# EAGLE board motor_connector_board (EAGLE 8.5.0)
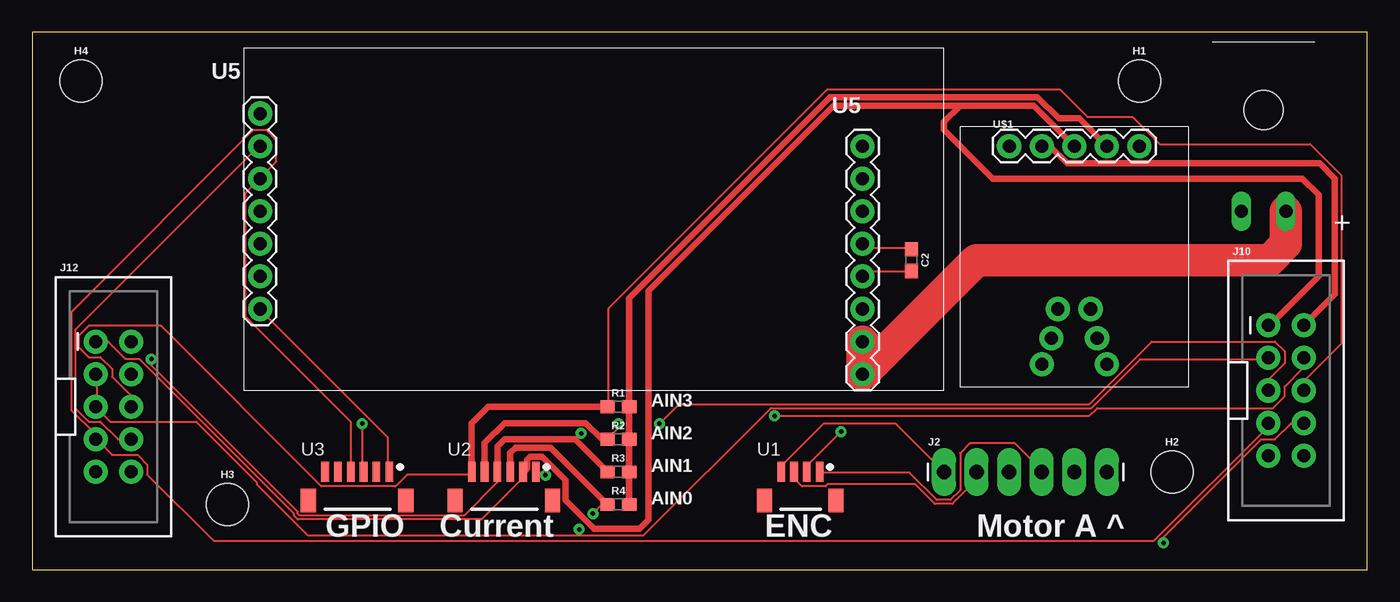
[diagram p0: board, top side]
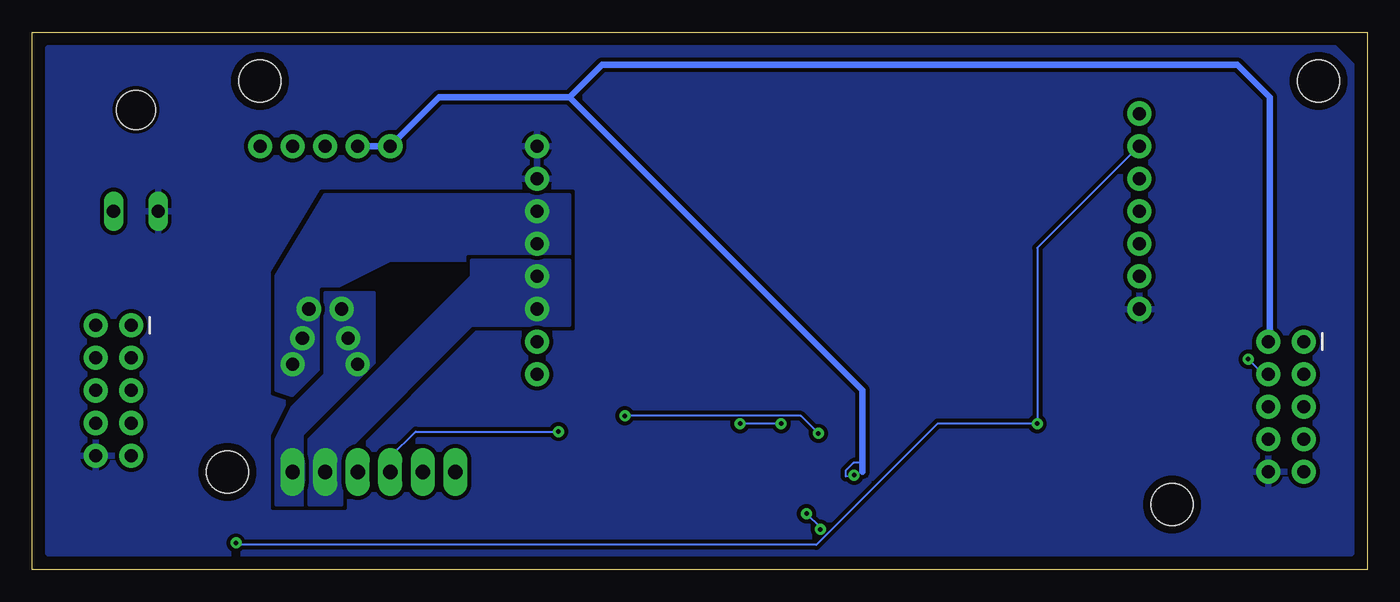
[diagram p1: board, bottom side, seen from below]

Size 104.14 x 41.91 mm. Coordinates in mm from the lower left corner, seen from the top.
Outline: 0,0 104.14,0 104.14,41.91 0,41.91 0,0
Copper layers (1*16): Top 0.035mm / dielectric 1.5mm / Bottom 0.035mm
Design rules "SparkFun-2-layer-STANDARD": minimum track width 10mil, minimum drill 20mil, track to track 10mil, track to pad 8mil, pad to pad 8mil, via to via 10mil, smd to smd 8mil, copper to edge 8mil, drill to drill 8mil, minimum pad ring 10mil, minimum via ring 10mil, stop-mask expansion 4mil, vias tented up to drill 25mil, thermal gap 10mil
Net classes: 0 default: width 0.152 mm, drill 0.254 mm, clearance 0.152 mm; 1 ground: width 0.152 mm, drill 0.254 mm, clearance 0.152 mm; 3 power: width 0.152 mm, drill 0.254 mm, clearance 0.152 mm

## Footprints (pad centres in the part's own frame; a part is rotated, then mirrored left to right if it is on the bottom)
0603 = smd 1.1 x 1: 1 -0.85,0; 2 0.85,0
STAND-OFF = hole 3.302: 0,0
1X06_LONGPADS = drill 1.118 pad 1.88 long: 1 0,0; 2 2.54,0; 3 5.08,0; 4 7.62,0; 5 10.16,0; 6 12.7,0
2X5-SHROUDED_LOCK = drill 1.016 pad 1.88: 1 -1.397,5.08; 2 1.397,5.08; 3 -1.397,2.54; 4 1.397,2.54; 5 -1.397,0; 6 1.397,0; 7 -1.397,-2.54; 8 1.397,-2.54; 9 -1.397,-5.08; 10 1.397,-5.08
JST_SH_4_SMD = smd 0.6 x 1.55: 1 0.46,1.27; 2 -0.54,1.27; 3 -1.54,1.27; 4 -2.54,1.27 | smd 1.2 x 1.8: P$1 -3.84,-0.955; P$2 1.728,-0.955
JST_SH_6 = smd 0.6 x 1.55: 1 5,0; 2 4,0; 3 3,0; 4 2,0; 5 1,0; 6 0,0 | smd 1.2 x 1.8: P$1 -1.3,-2.225; P$2 6.3,-2.225
MOLEX_ULTRAFIT-2CKT = drill 1.02 long: + 0,0; - 3.5,0 | hole 3.05: 1.75,-7.91
SMC = drill 1.016 pad 1.88: 1 0,0; 2 0,-2.54; 3 0,-5.08; 4 0,-7.62; 5 0,-10.16; 6 0,-12.7; 7 0,-15.24; 8 0,-17.78; 9 -46.99,2.54; 10 -46.99,0; 11 -46.99,-2.54; 12 -46.99,-5.08; 13 -46.99,-7.62; 14 -46.99,-10.16; 15 -46.99,-12.7
ACS_CURRENT_SENSOR = drill 1.016 pad 1.88: 1 0,-10.16; 2 0,-7.62; 3 0,-5.08; 4 0,-2.54; 5 0,0; IN-1 12.7,-3.81; IN-2 14.986,-3.302; IN-3 17.018,-2.54; OUT-1 12.7,-6.35; OUT-2 14.986,-6.858; OUT-3 17.018,-7.62

## Placement (x,y rotation side)
C2  0.1uF  [0603]  68.58,24.13 270 top
FRAME1  FRAME-LEDGER  [CREATIVE_COMMONS]  11.43,2.54 0 top
H1  STAND-OFF  [STAND-OFF]  86.36,38.1 0 top
H2  STAND-OFF  [STAND-OFF]  88.9,7.62 0 top
H3  STAND-OFF  [STAND-OFF]  15.24,5.08 0 top
H4  STAND-OFF  [STAND-OFF]  3.81,38.1 0 top
J2  [1X06_LONGPADS]  71.12,7.62 0 top
J10  [2X5-SHROUDED_LOCK]  97.79,13.97 0 top
J12  [2X5-SHROUDED_LOCK]  6.35,12.7 0 top
R1  0  [0603]  45.72,12.7 0 top
R2  0  [0603]  45.72,10.16 0 top
R3  0  [0603]  45.72,7.62 0 top
R4  0  [0603]  45.72,5.08 0 top
U1  JST_SH_4  [JST_SH_4_SMD]  60.96,6.35 0 top
U2  JST_SH_6  [JST_SH_6]  34.29,7.62 0 top
U3  JST_SH_6  [JST_SH_6]  22.86,7.62 0 top
U4  MOLEX_ULTRAFIT  [MOLEX_ULTRAFIT-2CKT]  97.79,27.94 180 top
U5  SMC  [SMC]  64.77,33.02 0 top
U$1  ACS711EX  [ACS_CURRENT_SENSOR]  86.36,33.02 270 top

## Library data of the parts
C2 = SparkFun-Capacitors; PROD_ID: CAP-07886
FRAME1 = SparkFun-Aesthetics
H1-H4 = SparkFun-Hardware
J2 = SparkFun-Connectors
J10 J12 = SparkFun-Connectors; PROD_ID: CONN-08671; SF_ID: PRT-08506
R1-R4 = SparkFun-Resistors; PROD_ID: RES-08609
U1-U3 = Strawson_Eagle_Lib
U4 U5 U$1 = WallE_Motor_Board

## Nets
ACS_GND: J10.2 J12.2 U2.1 U$1.1 U$1.2
ACS_OUT: R1.2 R2.2 R3.2 R4.2 U$1.4
ACS_VCC: J10.1 J12.1 U2.2 U$1.3
AIN0: J10.3 J12.3 J12.5 R4.1 U2.3
AIN1: J10.4 J12.4 R3.1 U2.4
AIN2: J10.5 R2.1 U2.5
AIN3: J10.6 J12.6 R1.1 U2.6
ENC_A: J2.2 U1.3
ENC_B: J2.1 U1.4
ENC_GND: J2.4 U1.1
ENC_VCC: J2.3 U1.2
GND: J10.10 J12.10 U3.1 U4.- U5.1 U5.2 U5.15
MOTORA: J2.6 U$1.OUT-1 U$1.OUT-2 U$1.OUT-3
MOTORB: C2.2 J2.5 U5.5 U5.6
MOTOROUTA: C2.1 U5.3 U5.4 U$1.IN-1 U$1.IN-2 U$1.IN-3
SMC_ERR: J10.8 J12.8 U3.3 U5.10
SMC_RST: J10.7 J12.7 U3.4 U5.11
VIN: U4.+ U5.7 U5.8

## Tracks (layer width: path | path; a pad name or v marks a point on that pad's centre or on a via)
ACS_GND  (via drill 0.35)
  Top 0.152: v40.03,7.37 39.78,7.57 39.32,7.57 U2.1
  Top 0.508: U$1.2 79.38,33.02 80.72,31.67 100.41,31.67 101.6,30.48 101.6,21.46 J10.2
  Bottom 0.152: v40.03,7.37 40.69,7.26 40.69,7.72 40.08,8.33 39.37,8.33
  Bottom 0.508: U$1.2 U$1.1 72.39,36.83 62.23,36.83 | 62.23,36.83 39.37,13.97 39.37,8.33 39.37,7.62 | 62.23,36.83 59.69,39.37 10.16,39.37 7.62,36.83 7.62,17.91 J12.2
ACS_OUT
  Top 0.508: R4.2 R3.2 R2.2 R1.2 46.57,21.17 62.23,36.83 78.42,36.83 80.07,35.18 81.66,35.18 U$1.4
ACS_VCC
  Top 0.152: J12.1 5.94,17.78 7.31,16.41 8.38,16.41 20.42,4.37 20.42,4.22 20.73,3.91 35.05,3.91 38.25,7.11 38.25,7.42 U2.2
  Top 0.508: U$1.3 78.13,36.17 72.39,36.17 | 72.39,36.17 62.5,36.17 48.09,21.76 48.09,3.9 47.37,3.17 43.81,3.17 41.6,5.39 41.6,6.96 39.76,8.8 38.82,8.8 38.58,8.56 38.58,7.91 U2.2 | 72.39,36.17 71.12,34.9 71.12,34.29 74.93,30.48 99.06,30.48 100.33,29.21 100.33,22.86 96.52,19.05 J10.1
AIN0  (via drill 0.35)
  Top 0.152: J12.3 5.03,15.19 5.03,12.75 J12.5 5.03,12.6 6.1,11.53 12.8,11.53 17.53,6.81 17.53,6.66 21.49,2.69 42.67,2.69 | 42.67,2.69 47.7,2.69 57.61,12.6 82.6,12.6 86.41,16.41 96.32,16.41 J10.3 | v43.74,4.37 44.5,5.13 R4.1 | 42.67,2.69 v42.67,3.15
  Top 0.508: R4.1 40.45,9.5 37.69,9.5 37.29,9.1 U2.3
  Bottom 0.152: v43.74,4.37 42.67,3.3 v42.67,3.15
AIN1  (via drill 0.35)
  Top 0.152: v9.3,16.41 9.3,15.95 20.73,4.52 20.73,4.37 20.88,4.22 33.68,4.22 36.27,6.81 36.27,7.42 U2.4 | v57.91,11.99 82.45,11.99 83.06,12.6 96.77,12.6 97.69,13.51 97.69,14.27 99.06,15.65 99.06,16.41 J10.4 | v42.82,10.62 42.52,10.31 42.33,10.16
  Top 0.508: R3.1 42.33,10.16 36.83,10.16 36.29,9.62 U2.4
  Bottom 0.152: v9.3,16.41 8.23,15.34 7.77,15.34 J12.4 | v57.91,11.99 44.2,11.99 v42.82,10.62
AIN2  (via drill 0.35)
  Top 0.152: v48.92,11.38 50.44,12.9 82.45,12.9 87.33,17.78 96.93,17.78 97.69,17.02 97.69,16.1 96.47,14.88 96.47,13.97 J10.5 | v45.72,11.38 45.72,11.07 44.96,10.31 R2.1
  Top 0.508: R2.1 44.45,10.16 43.18,11.43 36.83,11.43 35.29,9.89 U2.5
  Bottom 0.152: v45.72,11.38 v48.92,11.38
AIN3
  Top 0.152: J12.6 7.62,12.75 7.62,13.66 6.25,15.04 6.25,15.65 5.33,16.56 4.42,16.56 3.66,17.32 3.66,18.24 4.42,19 10.06,19 22.55,6.5 28.35,6.5 29.26,7.42 34.14,7.42 U2.6 | J10.6 99.21,13.97 99.21,14.73 102.11,17.63 102.11,30.73 99.67,33.17 87.94,33.17 85.8,35.31 82.3,35.31 80.16,37.44 62.03,37.44 44.96,20.37 44.96,12.9 R1.1
  Top 0.508: R1.1 35.56,12.7 34.29,11.43 U2.6
ENC_A
  Top 0.152: U1.3 59.44,7.57 59.44,7.11 60.05,6.5 61.87,6.5 62.03,6.66 68.89,6.66 70.41,5.13 71.78,5.13 73.61,6.96 73.61,7.57 J2.2
ENC_B
  Top 0.152: J2.1 67.36,11.38 61.72,11.38 58.52,8.18 58.52,7.72 U1.4
ENC_GND
  Top 0.152: U1.1 61.57,7.57 68.43,7.57 70.56,5.44 71.63,5.44 72.39,6.2 72.39,9.09 73.15,9.86 76.66,9.86 78.79,7.72 J2.4
ENC_VCC  (via drill 0.35)
  Top 0.152: v63.09,10.77 60.5,8.18 60.5,7.72 U1.2
  Bottom 0.152: v63.09,10.77 74.22,10.77 76.2,8.79 J2.3
GND
  Top 0.152: U3.1 27.74,7.72 27.74,10.31 17.83,20.22 U5.15
  pour Bottom (isolate 0.305, rank 6): 102.87,40.64 102.87,1.27 1.27,1.27 1.27,39.37 2.54,40.64
MOTORA
  pour Bottom (isolate 0.305, rank 4, no thermals): 81.28,21.59 77.47,21.59 77.47,15.24 82.55,10.16 82.55,5.08 85.09,5.08 85.09,10.16 83.82,12.7 81.28,15.24
MOTORB
  Top 0.152: C2.2 68.58,23.27 65.08,23.27 64.77,22.96 U5.5
  pour Bottom (isolate 0.305, rank 3, no thermals): 69.85,24.13 62.23,24.13 62.23,19.05 69.85,19.05 80.01,8.89 80.01,5.08 82.55,5.08 82.55,10.16 69.85,22.86
MOTOROUTA
  Top 0.152: U5.4 65.08,25.09 68.58,25.09 C2.1
  pour Bottom (isolate 0.305, rank 5, no thermals): 62.23,29.21 62.23,24.13 76.2,24.13 81.28,21.59 81.28,12.7 85.09,13.97 85.09,22.86 81.28,29.21
SMC_ERR  (via drill 0.35)
  Top 0.152: v25.76,11.38 25.76,7.72 U3.3 | J12.8 6.71,10.16 5.33,11.53 4.42,11.53 3.35,12.6 3.35,18.69 17.68,33.02 U5.10 | v88.24,2.08 88.24,2.54 95.86,10.16 96.93,10.16 98.15,11.38 99.06,11.38 J10.8
  Bottom 0.152: U5.10 17.83,33.02 25.76,25.09 v25.76,11.38 33.53,11.38 42.98,1.93 88.09,1.93 v88.24,2.08
SMC_RST
  Top 0.152: U3.4 24.84,7.72 24.84,11.53 16.61,19.76 16.61,29.36 17.68,30.43 U5.11 17.83,30.58 19.05,31.8 19.05,33.48 18.29,34.24 17.22,34.24 3.05,20.07 3.05,12.45 4.88,10.62 4.88,10.16 J12.7 5.03,10.16 6.25,8.94 8.23,8.94 8.99,8.18 8.99,7.42 14.17,2.23 87.48,2.23 96.32,11.07 96.32,11.38 J10.7
VIN
  Top 2.54: U4.+ 97.79,25.4 96.52,24.13 73.66,24.13 U5.8 U5.7

## Text on the board
tPlace: AIN3 | AIN2 | AIN1 | AIN0 | GPIO | Current | ENC | Motor A ^